# Altium PCB PCBsoldeerstation.PcbDoc
Units mil, origin at the board's own origin, x right, y up, seen from the top; angles counter-clockwise.
Board outline 3550.6 x 3574.88 mil, 2 copper layers (Top Layer, Bottom Layer); 64 components, 59 nets, 212 pads, 0 vias.
Unrouted connection lines stored in the file: 144.
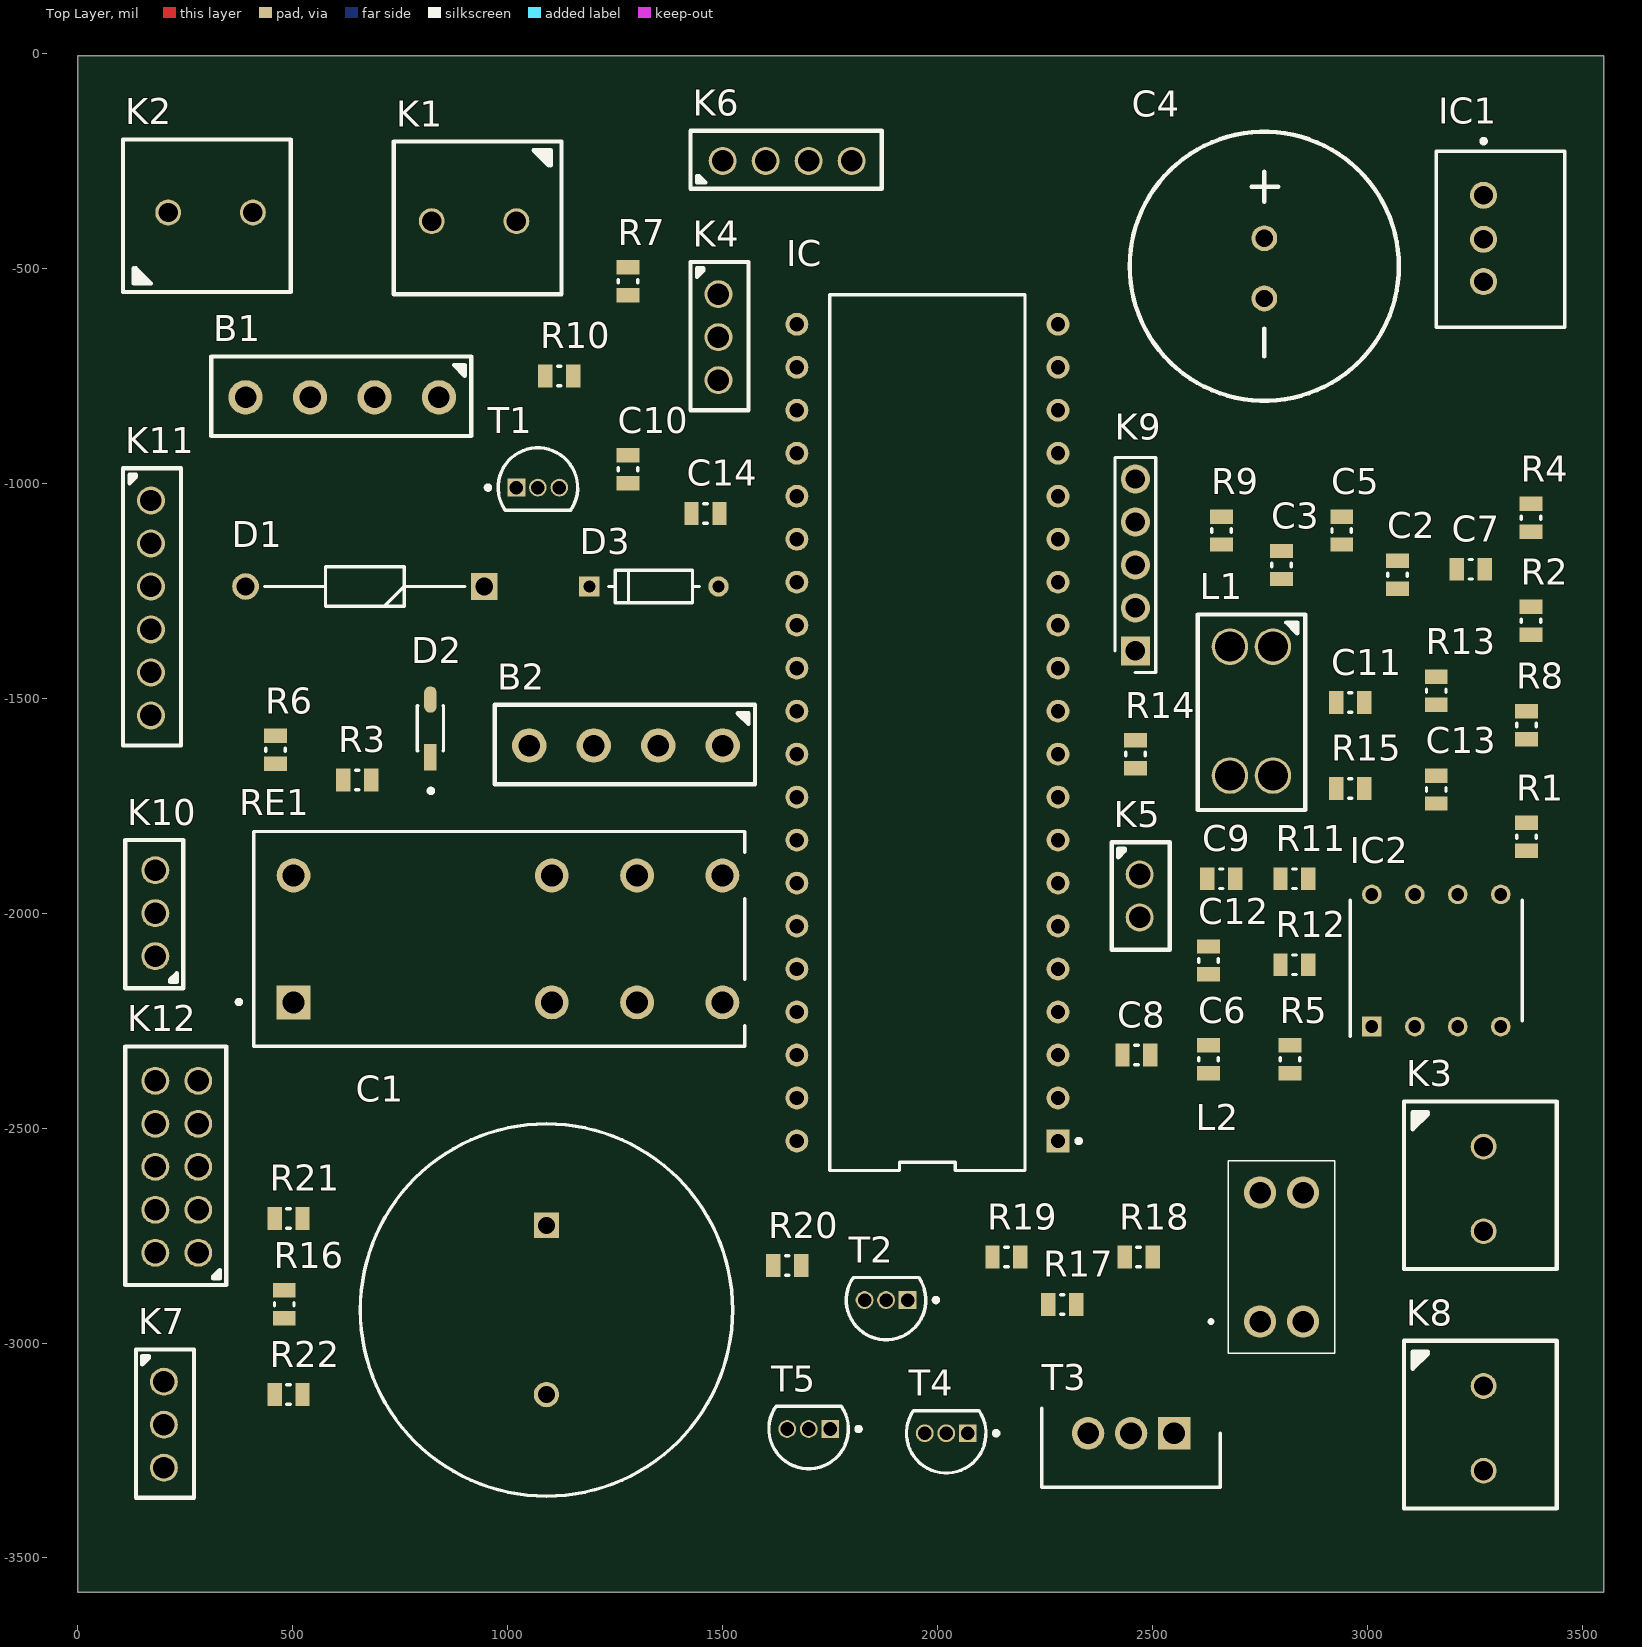
[diagram p0: Top Layer view]
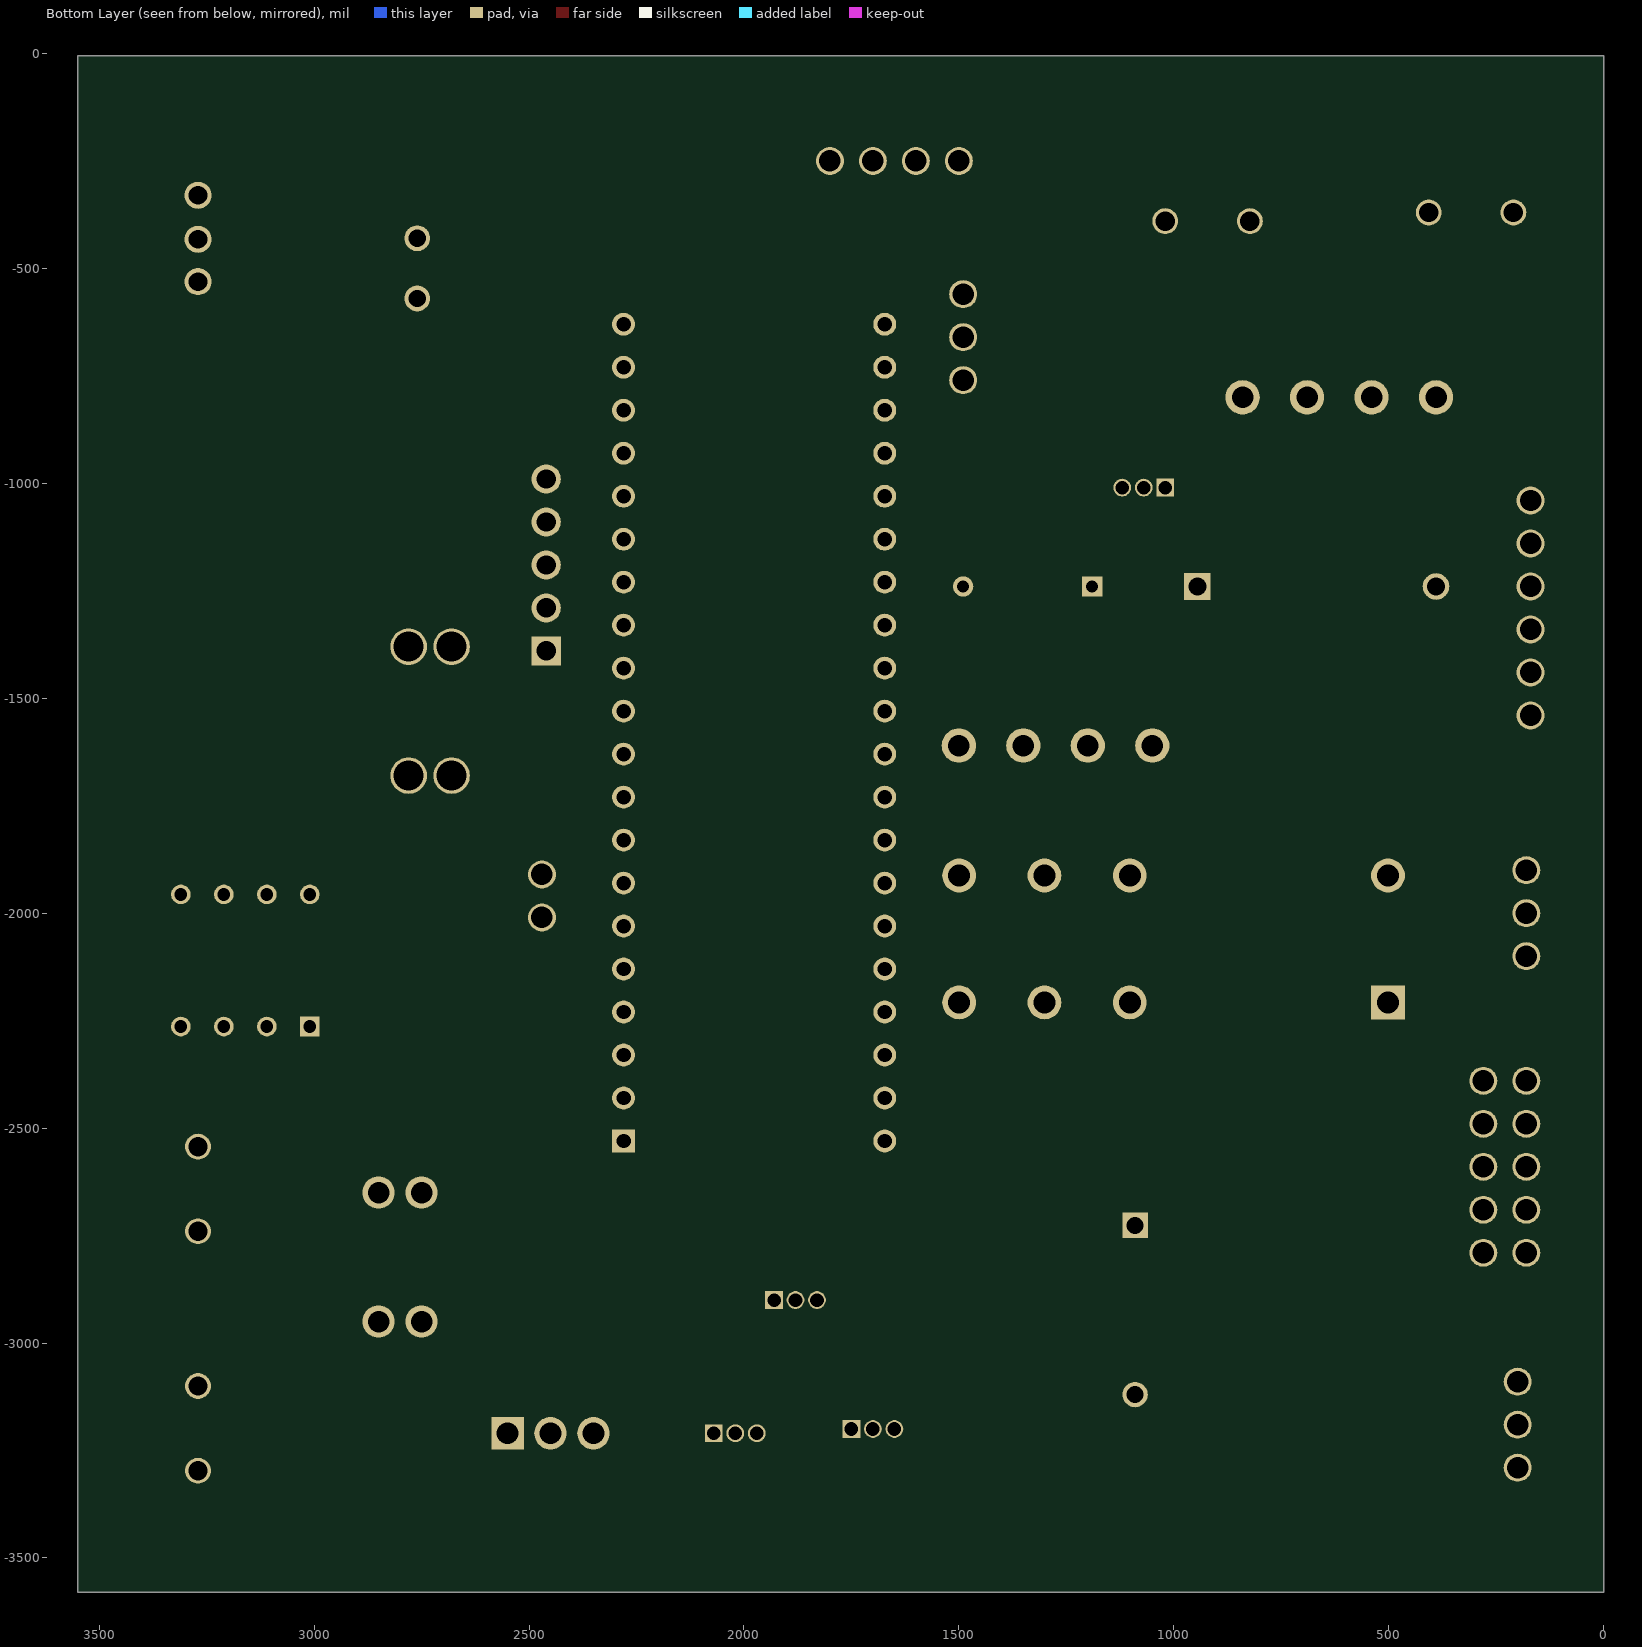
[diagram p1: Bottom Layer view, seen from below]

## Layer stack, top to bottom
Top Solder: solder mask 0.4, Solder Resist, Dk 3.5
Top Layer: signal copper 1.4
Dielectric 1: dielectric 12.6, FR-4, Dk 4.8
Bottom Layer: signal copper 1.4
Bottom Solder: solder mask 0.4, Solder Resist, Dk 3.5

## Board outline
-0.6,-5.12 3550,-5.12 3550,-3580 -0.6,-3580

## Design rules (kind name [scope] priority, off if disabled: settings)
Clearance [All] p1: gap=10 ignorepadtopadclearanceinfootprint=FALSE except(0: Arc-Hole Track-Hole SMDPad-Hole THPad-Hole Via-Hole Fill-Hole Poly-Hole Region-Hole Text-Hole)
PolygonConnect [All] p1: connectstyle=Relief reliefconductorwidth=10 reliefentries=4 polygonreliefangle="90 Angle" airgapwidth=10
RoutingVias [All] p1: holewidth=28 width=50 viastyle="Through Hole" minholewidth=28 minwidth=50 maxholewidth=28 maxwidth=50
SolderMaskExpansion [All] p1: expansion=4 istentingtop=FALSE
Width [All] p1: maxlimit=50 minlimit=25 preferedwidth=30 minimp=50.000000 maximp=50.000000 favimp=50.000000
30 further rules are at their usual default settings.

## Classes and differential pairs
component class voeding: B1 B2 C1 C4 C5 D1 D2 IC1 K1 K2 R3 R6 R7 R10 RE1 T1
component class thermokoppel: K8 L2 R17 R18 R19 R20 T2 T3 T4 T5
component class soldeerboutaansturing: C2 C3 C6 C7 C12 C13 IC2 K3 R1 R2 R4 R5 R8 R9 R11 R12 R13 R14 R15
component class cpuofmicrocontroller: C8 C9 C10 C11 C14 D3 IC K4 K5 K6 K7 K9 K10 K11 K12 L1 R16 R21 R22

## Components (designator, comment, footprint, x,y, rotation, side; value= is the part's Value field where it differs from the comment)
B1 "D6KB6U" D6KB6U 840,-800 r180 top
B2 "D6KB6U" D6KB6U 1500,-1610 r180 top
C1 "4700µ" CAPPRD1000W80D2200H3700 1090,-2726.3 r270 top
C2 "" RESC2013X50X30LL20T20 3070,-1212.48 r90 top value="0.10 μF"
C3 "" RESC2013X50X30LL20T20 2800,-1190 r90 top
C4 "100µ" "100uF/50v aluminum electrolytic capacitor" 2760,-430 r270 top value="0.10 μF"
C5 "10µ" RESC2013X50X30LL20T20 2940,-1110 r90 top value="0.10 μF"
C6 "10n" RESC2013X50X30LL20T20 2630,-2340 r90 top
C7 "10n" RESC2013X50X30LL20T20 3240,-1200 r180 top
C8 "100n" RESC2013X50X30LL20T20 2462.48,-2330 r0 top
C9 "100n" RESC2013X50X30LL20T20 2660,-1920 r0 top
C10 "10µ" RESC2013X50X30LL20T20 1280,-967.52 r270 top value="0.10 μF"
C11 "100n" RESC2013X50X30LL20T20 2960,-1510 r0 top
C12 "10n" RESC2013X50X30LL20T20 2630,-2110 r270 top
C13 "10n" RESC2013X50X30LL20T20 3160,-1712.48 r90 top
C14 "100n" RESC2013X50X30LL20T20 1460,-1070 r0 top
D1 "1N4007" DIOAD1405W86L465D235 945.12,-1240 r180 top
D2 "5V1" FP-SOD123-IPC_A 820,-1570 r90 top
D3 "1N4148" FP-017AG-MFG 1340,-1240 r0 top
IC "ATMEGA4809-PF" FP-C04-016-MFG 1976.25,-1580 r180 top
IC1 "" MURA-OKI-78SR-3 3270,-432.36 r270 top
IC2 "OPAMP" DIP781W56P254L950H533Q8N 3160,-2110 r90 top
K1 "printkroonsteen 2pin" "printkroonsteen 2pin" 1020,-390 r180 top
K2 "printkroonsteen 2pin" "printkroonsteen 2pin" 210,-370 r0 top
K3 "printkroonsteen 2pin" "printkroonsteen 2pin" 3270,-2543 r270 top
K4 "" "PINHEADER, 1RIJIG,3-POLIG" 1490,-560 r270 top
K5 "" Pinheader,1rijig,2-polig 2470,-1910 r270 top
K6 "" "PINHEADER, 1RIJIG,4-POLIG - duplicate" 1500,-250 r0 top
K7 "Pinheader,1rijig,3-polig" "PINHEADER, 1RIJIG,3-POLIG" 200,-3090 r270 top
K8 "" "printkroonsteen 2pin" 3270,-3100 r270 top
K9 "" HDRV5W67P0X254_1X5_1270X241X858P 2460,-1390 r90 top
K10 "" "PINHEADER, 1RIJIG,3-POLIG" 180,-2100 r90 top
K11 "" "PINHEADER, 1RIJIG,6-POLIG - duplicate - duplicate" 170,-1040 r270 top
K12 "Pinheader,2rijig,10-polig" "PINHEADER, 2RIJIG,10-POLIG - duplicate - duplicate - duplicate" 280,-2790 r90 top
L1 "10µH" "Laird CM2545x171B-10" 2780,-1380 r180 top
L2 "CM2545X171B-10" CM2545X171B10 2750,-2950 r0 top
R1 "18K" RESC2013X50X30LL20T20 3370,-1822.48 r270 top
R2 "1M" RESC2013X50X30LL20T20 3380,-1320 r90 top
R3 "68K" RESC2013X50X30LL20T20 650,-1690 r180 top
R4 "5K6" RESC2013X50X30LL20T20 3380,-1080 r270 top
R5 "5K6" RESC2013X50X30LL20T20 2820,-2340 r90 top
R6 "10K" RESC2013X50X30LL20T20 460,-1620 r270 top
R7 "10K" RESC2013X50X30LL20T20 1280,-530 r270 top
R8 "100" RESC2013X50X30LL20T20 3370,-1562.48 r270 top
R9 "10M" RESC2013X50X30LL20T20 2660,-1110 r270 top
R10 "4K7" RESC2013X50X30LL20T20 1120,-750 r180 top
R11 "10K" RESC2013X50X30LL20T20 2830,-1920 r180 top
R12 "18K" RESC2013X50X30LL20T20 2830,-2120 r0 top
R13 "5K6" RESC2013X50X30LL20T20 3160,-1482.48 r90 top
R14 "5K6" RESC2013X50X30LL20T20 2460,-1630 r270 top
R15 "100" RESC2013X50X30LL20T20 2960,-1710 r0 top
R16 "4k7" RESC2013X50X30LL20T20 480,-2910 r270 top
R17 "4K7" RESC2013X50X30LL20T20 2290,-2910 r180 top
R18 "100" RESC2013X50X30LL20T20 2467.52,-2800 r0 top
R19 "10k" RESC2013X50X30LL20T20 2160,-2800 r180 top
R20 "4K7" RESC2013X50X30LL20T20 1650,-2820 r180 top
R21 "4k7" RESC2013X50X30LL20T20 490,-2710 r180 top
R22 "4k7" RESC2013X50X30LL20T20 490,-3120 r0 top
RE1 "" FP-RT424005-MFG 980,-2060 r0 top
T1 "BC547C" ONSC-TO-92-3-29-11 1070,-1010 r0 top
T2 "BC547C" ONSC-TO-92-3-29-11 1880,-2900 r180 top
T3 "IRF9Z34NPBF" TO254P469X1042X1967-3P 2550,-3210 r180 top
T4 "BC547C" ONSC-TO-92-3-29-11 2020,-3210 r180 top
T5 "BC557C" ONSC-TO-92-3-29-11 1700,-3200 r180 top

## Footprints (in the part's own frame and the unit in brackets; to place one, negate y for a bottom-side part, rotate by r counter-clockwise, add the part's x,y. Pads: shape width x height; smd on the part's side, far side on the other; paste and mask are expansions set on the pad)
"100uF/50v aluminum electrolytic capacitor" [mil]
  round 60 hole 40: 1(0,0) 2(140,0)
  silkscreen extent -248,-313 378,313
CAPPRD1000W80D2200H3700 [mm]
  rect 1.5x1.5 hole 1: 1(0,0)
  round 1.5 hole 1: 2(10,0)
  silkscreen extent -6,-11 16,11, body extent -6.24,-11.25 16.24,11.25, height 38.01
CM2545X171B10 [mil]
  round 75 hole 50: 1(0,0) 2(100,0) 3(100,300) 4(0,300)
  silkscreen extent -118,-74 174,374, body extent -74,-74 174,374, height 378
D6KB6U [mil] "bridge rectifier"
  round 80 / inner round 60 / far side round 80 hole 50: 1(0,0) 2(150,0) 3(300,0) 4(450,0)
  silkscreen extent -75,-95 530,90
DIOAD1405W86L465D235 [mm]
  rect 1.575x1.575 hole 1.05: 1(0,0)
  round 1.575 hole 1.05: 2(14.1,0)
  silkscreen extent 1.14,-1.17 12.96,1.17, body extent -0.43,-1.34 14.48,1.34, height 2.7
DIP781W56P254L950H533Q8N [mm]
  rect 1.158x1.158 hole 0.758: 1(-3.905,3.81)
  round 1.158 hole 0.758: 2(-3.905,1.27) 3(-3.905,-1.27) 4(-3.905,-3.81) 5(3.905,-3.81) 6(3.905,-1.27) 7(3.905,1.27) 8(3.905,3.81)
  silkscreen extent -4.48,-5.08 3.56,5.08, body extent -4.04,-4.75 4.04,4.75, height 5.33
FP-017AG-MFG [mm]
  rect 1.2x1.2 hole 0.7 paste-1000 mask+0: 1(-3.813,0)
  round 1.2 hole 0.7 paste-1000 mask+0: 2(3.813,0)
  silkscreen extent -2.68,-0.95 2.68,0.95, body extent -4.51,-1.05 4.51,1.05, height 0.25
FP-C04-016-MFG [mm]
  rect 1.35x1.35 hole 0.85 paste-1000 mask+0: 1(-7.715,24.13)
  round 1.35 hole 0.85 paste-1000 mask+0: 2(-7.715,21.59) 3(-7.715,19.05) 4(-7.715,16.51) 5(-7.715,13.97) 6(-7.715,11.43) 7(-7.715,8.89) 8(-7.715,6.35) 9(-7.715,3.81) 10(-7.715,1.27) 11(-7.715,-1.27) 12(-7.715,-3.81) 13(-7.715,-6.35) 14(-7.715,-8.89) 15(-7.715,-11.43) 16(-7.715,-13.97) 17(-7.715,-16.51) 18(-7.715,-19.05) 19(-7.715,-21.59) 20(-7.715,-24.13) 21(7.715,-24.13) 22(7.715,-21.59) 23(7.715,-19.05) 24(7.715,-16.51) 25(7.715,-13.97) 26(7.715,-11.43) 27(7.715,-8.89) 28(7.715,-6.35) 29(7.715,-3.81) 30(7.715,-1.27) 31(7.715,1.27) 32(7.715,3.81) 33(7.715,6.35) 34(7.715,8.89) 35(7.715,11.43) 36(7.715,13.97) 37(7.715,16.51) 38(7.715,19.05) 39(7.715,21.59) 40(7.715,24.13)
  silkscreen extent -9.07,-25.88 5.76,25.88, body extent -8.49,-26.71 8.49,26.71, height 0.25
FP-RT424005-MFG [mm]
  round 2 hole 1.3 paste-1000 mask+0: 11(8.15,-3.75) 12(3.11,-3.75) 14(13.19,-3.75) 21(8.15,3.75) 22(3.11,3.75) 24(13.19,3.75) A2(-12.15,3.75)
  rect 2x2 hole 1.3 paste-1000 mask+0: A1(-12.15,-3.75)
  silkscreen extent -15.5,-6.35 14.5,6.35, body extent -14.6,-6.45 14.6,6.45, height 0.25
FP-SOD123-IPC_A [mil]
  rect 61.32x29.23 smd paste+0 mask+0: 1(-66.94,0)
  rrect100% 61.32x29.23 smd paste+0 mask+0: 2(66.94,0)
  silkscreen extent -150,-31 52,31, body extent -117,-50 117,50, height 10
HDRV5W67P0X254_1X5_1270X241X858P [mm]
  rect 1.725x1.725 hole 1.15: 1(0,0)
  round 1.725 hole 1.15: 2(2.54,0) 3(5.08,0) 4(7.62,0) 5(10.16,0)
  silkscreen extent -1.27,-1.2 11.43,1.2, body extent -1.27,-1.2 11.43,1.2, height 8.58
"Laird CM2545x171B-10" [mil] "spoel 2"
  round 85 hole 70: 1(0,0) 2(100,0) 3(100,300) 4(0,300)
  silkscreen extent -75,-75 175,380
MURA-OKI-78SR-3 [mm] "THMT, 3-Leads, Body 10.4x7.6mm"
  round 1.6 hole 1.1: 1(-2.6,0) 2(0,0) 3(2.5,0)
  silkscreen extent -5.92,-2.8 5.2,4.8, body extent -5.2,-2.8 5.2,4.8, height 16.5
ONSC-TO-92-3-29-11 [mm] "TO, 3-Leads, Body Dia 4.7mm, Pitch 1.27mm"
  rect 1.05x1.05 hole 0.8: 1(-1.27,0)
  round 1.05 hole 0.8: 2(0,0) 3(1.27,0)
  silkscreen extent -3.07,-1.34 2.35,2.35, body extent -2.35,-1.33 2.36,2.36, height 7.87
Pinheader,1rijig,2-polig [mil]
  round 65 hole 50: 1(0,0) 2(100,0)
  silkscreen extent -75,-65 175,70
"PINHEADER, 1RIJIG,3-POLIG" [mil]
  round 65 hole 50: 1(0,0) 2(100,0) 3(200,0)
  silkscreen extent -75,-65 270,70
"PINHEADER, 1RIJIG,4-POLIG - duplicate" [mil]
  round 65 hole 50: 1(0,0) 2(100,0) 3(200,0) 4(300,0)
  silkscreen extent -75,-65 370,70
"PINHEADER, 1RIJIG,6-POLIG - duplicate - duplicate" [mil]
  round 65 hole 50: 1(0,0) 2(100,0) 3(200,0) 4(300,0) 5(400,0) 6(500,0)
  silkscreen extent -75,-65 570,70
"PINHEADER, 2RIJIG,10-POLIG - duplicate - duplicate - duplicate" [mil]
  round 65 hole 50: 1(0,0) 2(100,0) 3(200,0) 4(300,0) 5(400,0) 6(0,100) 7(100,100) 8(200,100) 9(300,100) 10(400,100)
  silkscreen extent -75,-65 480,170
"printkroonsteen 2pin" [mil]
  round 60 hole 45: 1(0,0) 2(197,0)
  silkscreen extent -105,-185 285,170
RESC2013X50X30LL20T20 [mm] "Chip Resistor, 2-Leads, Body 2.00x1.25mm, IPC High Density"
  rect 0.85x1.35 smd: 1(-0.825,0) 2(0.825,0)
  silkscreen extent -0.1,-0.58 0.1,0.58, body extent -1.1,-0.72 1.1,0.72, height 0.5
TO254P469X1042X1967-3P [mm]
  rect 1.92x1.92 hole 1.28: 1(0,0)
  round 1.92 hole 1.28: 2(2.54,0) 3(5.08,0)
  silkscreen extent -2.73,-1.5 7.81,3.19, body extent -2.67,-1.5 7.75,3.19, height 18.84

## Part data
C1: library part CondensatorGroot, "Capacitor Polarised", Manufacturer_Name=KEMET, Manufacturer_Part_Number=ESK478M050AQ3AA, Mouser Part Number=80-ESK478M050AQ3AA, Datasheet Link=https://content.kemet.com/datasheets/KEM_A4004_ESK.pdf, Height=37mm, Mouser Price/Stock=https://www.mouser.co.uk/ProductDetail/KEMET/ESK478M050AQ3AA?qs=gt1LBUVyoHl7SM9dsUCJjA%3D%3D
C2: library part "Elektrolytische Capacitor", "CAP CER 0.1UF 10V X5R 0402", Capacitance="0.10 μF", Manufacturer=Kemet, Manufacturer Part Number=C0402C104K8PACTU, Package=C0402-BB, Temperature="-55°C to +125°C", Temperature Characteristic=X5R, Temperature Coefficient=15%, Temperature Range High=+125°C, Temperature Range Low=-55°C, Tolerance=0.1, Voltage Rating="10 V", Automotive=No, Category=Cap, ComponentLink2Description=Datasheet, ComponentLink2URL=https://content.kemet.com/datasheets/KEM_C1002_X7R_SMD.pdf, Device Class L1="Passive Components", Device Class L2=Capacitors, Device Class L3="Ceramic Capacitors", Digikey Description="CAP CER 0.1UF 10V X5R 0402", Height=0.55mm, Ipc Land Pattern Name=CAPC10050X50, Lead Free=Yes, Material=Ceramic, Mouser Description="Capacitor 100 nF 10 VDC 0402 | KEMET C0402C104K8PACTU (Capacitor 100 nF 10 VDC 0402 Ceramic Capacitors).", Octopart=https://octopart.com/c0402c104k8pactu-kemet-140039, RoHS=TRUE
C3 C14: library part "Ceramische Capacitor"
C4 C5 C10: library part Capacitor, "CAP CER 0.1UF 10V X5R 0402", Capacitance="0.10 μF", Manufacturer=Kemet, Manufacturer Part Number=C0402C104K8PACTU, Package=C0402-BB, Temperature="-55°C to +125°C", Temperature Characteristic=X5R, Temperature Coefficient=15%, Temperature Range High=+125°C, Temperature Range Low=-55°C, Tolerance=0.1, Voltage Rating="10 V", Automotive=No, Category=Cap, ComponentLink2Description=Datasheet, ComponentLink2URL=https://content.kemet.com/datasheets/KEM_C1002_X7R_SMD.pdf, Device Class L1="Passive Components", Device Class L2=Capacitors, Device Class L3="Ceramic Capacitors", Digikey Description="CAP CER 0.1UF 10V X5R 0402", Height=0.55mm, Ipc Land Pattern Name=CAPC10050X50, Lead Free=Yes, Material=Ceramic, Mouser Description="Capacitor 100 nF 10 VDC 0402 | KEMET C0402C104K8PACTU (Capacitor 100 nF 10 VDC 0402 Ceramic Capacitors).", Octopart=https://octopart.com/c0402c104k8pactu-kemet-140039, RoHS=TRUE
C6 C7 C8 C9 C11 C12 C13: library part capacitor2
D1: library part 1N4007-E3_73, "Diode", Arrow Part Number=1N4007-E3/73, Manufacturer_Name=Vishay, Mouser Part Number=625-1N4007-E3/73, Arrow Price/Stock=https://www.arrow.com/en/products/1n4007-e373/vishay?region=europe, Datasheet Link=https://mouser.componentsearchengine.com/Datasheets/2/1N4007-E3_73.pdf, Manufacturer_Part_Number=1N4007-E3/73, Mouser Price/Stock=https://www.mouser.co.uk/ProductDetail/Vishay-General-Semiconductor/1N4007-E3-73?qs=N4vtoAxH%2FSqT3Ng3e4K0Gw%3D%3D
D2: library part Zenerdiode, "DIODE ZENER 5.1V 500MW SOD123", Forward Current=10mA, Manufacturer="Diodes Incorporated", Manufacturer Part Number=BZT52C5V1-7-F, Max Junction Temp=+150°C, Max Reverse Leakage Current=2uA, Max Zener Voltage=5.4V, Nom Zener Voltage=5.1V, Package=SOD123, Power Dissipation=370mW, Temperature="-65°C to +150°C", Temperature Range Low=-65°C, Automotive=No, Automotive Grade=NA, Category=Diode, ComponentLink2Description=Datasheet, ComponentLink2URL=https://www.diodes.com/assets/Datasheets/ds18004.pdf, Device Class L1="Discrete Semiconductors", Device Class L2=Diodes, Device Class L3="Zener Diodes", Digikey Description="DIODE ZENER 5.1V 500MW SOD123", Footprint Url=https://www.diodes.com/assets/Package-Files/SOD123.pdf, Height=1.45mm, Lead Free=Yes, Mouser Description="Zener Diodes 5.1V 500mW", Octopart=https://octopart.com/bzt52c5v1-7-f-diodes+inc.-326718, RoHS=TRUE, Standoff Height=0mm, Temperature Range High=+150°C, Zener Impedance=60Ω
D3: "DIODE GEN PURP 100V 200MA DO35/1N4148", Average Rectified Current=200mA, Capacitance=4pF, Case/Package=DO-35, Current=4A, Forward Current=300mA, Forward Voltage=1V, Max Forward Surge Current (Ifsm)=1A, Max Operating Temperature=175°C, Max Power Dissipation=500mW, Max Repetitive Reverse Voltage (Vrrm)=100V, Max Reverse Current=5uA, Min Operating Temperature=-65°C, Package Quantity=2000, Contact Plating=Tin, Current Rating=200mA, Diameter=1.91mm, Element Configuration=Single, Height=4.56mm, Lead Free="Lead Free", Length=4.56mm, Max Reverse Voltage (DC)=100V, Max Surge Current=4A, Mount="Through Hole", Number of Pins=2, Output Current=200mA, Outside Diameter=1.85mm, Packaging=Bulk, Peak Non-Repetitive Surge Current=4A, Polarity=Standard, Power Dissipation=500mW, Radiation Hardening=No, REACH SVHC="No SVHC", Recovery Time=4ns, Reverse Recovery Time=4ns, Reverse Voltage=100V, Series=-, Voltage=100V, Voltage Rating (DC)=100V, Weight=0.01lb, Width=1.91mm
IC: library part aTmega4809-PF, "IC MCU 8BIT 48KB FLASH 40DIP", RoHS Compliant=Yes
IC1: library part OKI-78SR-5/1.5-W36-C, "Non-Isolated DC/DC Converter, 7.5 W, 7 to 36 V, 1.5 A, -40 to 85 degC, 3-Pin THD, RoHS", Current - Output (Max)=1.5A, Manufacturer=Murata, Operating Temperature=-40degC~85degC, Package / Case=3-SIPModule, Power (Watts) - Manufacture Series=8W, Voltage - Input (Max)=36V, Voltage - Input (Min)=7V, Voltage - Isolation=-, Voltage - Output 1=5V, Applications=ITE(Commercial), Category=PowerSupplies-BoardMount, Datasheet URL=https://datasheet.ciiva.com/8006/1790439-8006672.pdf, Datasheet Version=Oct-13, Efficiency=90.5%, Family=DCDCConverters, Features=SCP, Manufacturer URL=http://www.murata.com/, Mounting Type=ThroughHole, Number of Outputs=1, Packaging=Tube, Power (Watts) - Max=8W, Series=Okami™OKI-78SR, Size / Dimension="0.41\"Lx0.30\"Wx0.65\"H(10.4mmx7.6mmx16.5mm)", Type=LinearRegulatorReplacement, Voltage - Output 2=-, Voltage - Output 3=-
IC2: "CMP-0187-00133-3", Case/Package=PDIP, Input Bias Current=1pA, Input Offset Voltage (Vos)=4.5mV, Max Operating Temperature=125°C, Max Supply Voltage=6V, Min Operating Temperature=-40°C, Min Supply Voltage=1.8V, Nominal Supply Current=100uA, Operating Supply Voltage=5.5V, Output Current=23mA, Package Quantity=60, Power Supply Rejection Ratio (PSRR)=86dB, Voltage Gain=112dB, Amplifier Type="GENERAL PURPOSE", Bandwidth=1MHz, Common Mode Rejection Ratio=60dB, Gain Bandwidth Product=1MHz, Height=3.3mm, Input Offset Voltage-Max=4.5mV, Lead Free="Lead Free", Length=9.27mm, Mount="Through Hole", Number of Amplifiers=2, Number of Channels=2, Number of Circuits=2, Number of Elements=2, Number of Pins=8, Operating Supply Current=100uA, Output Current per Channel=23mA, Packaging=Rail/Tube, Radiation Hardening=No, REACH SVHC="No SVHC", RoHS Compliant=Yes, Slew Rate=0.6V/µs, Slew Rate-Nom=0.6V/µs, Supply Current=100uA, Technology=CMOS, Unity Gain Bandwidth Product=1MHz, Width=6.35mm
K4 K10: library part Pinheader,1rijig,3-polig
K5: library part Pinheader,1rijig,2-polig
K6: library part Pinheader,1rijig,4-polig
K8: library part "printkroonsteen 2pin"
K9: library part "5PIN HEADERmale", "Connector", Arrow Part Number=68000-105HTLF, Manufacturer_Name="Amphenol Communications Solutions", Mouser Part Number=649-68000-105HTLF, Arrow Price/Stock=https://www.arrow.com/en/products/68000-105htlf/amphenol-fci, Datasheet Link=https://cdn.amphenol-cs.com/media/wysiwyg/files/drawing/68000.pdf, Height=8.58mm, Manufacturer_Part_Number=68000-105HTLF, Mouser Price/Stock=https://www.mouser.co.uk/ProductDetail/Amphenol-FCI/68000-105HTLF?qs=w%2Fv1CP2dgqrYgNyQVoiqDw%3D%3D
K11: library part Pinheader,2rijig,6-polig
L1: library part spoelL1
L2: "Transformer", Manufacturer_Name="Laird Technologies", Mouser Part Number=N/A, Arrow Part Number=CM2545X171B-10, Arrow Price/Stock=https://www.arrow.com/en/products/cm2545x171b-10/laird-technologies, Datasheet Link=https://datasheet.datasheetarchive.com/originals/dk/DKDS-7/122753.pdf, Height=9.5mm, Manufacturer_Part_Number=CM2545X171B-10, Mouser Price/Stock=https://www.mouser.co.uk/ProductDetail/Laird/CM2545X171B-10?qs=PzGy0jfpSMtNfkEypgU65A%3D%3D
R1 R2 R3 R4 R5 R6 R7 R8 R9 R10 R11 R12 R13 R14 R15 R16 R17 R18 R19 R20 R21 R22: library part weerstand, Manufacturer="Vishay Dale", Part Number=CRCW08050000Z0EA
RE1: library part RT424005, "RELAY GENERAL PURPOSE DPDT 8A 5V", Ambient Temperature Range High=+85°C, Ambient Temperature Range Low=-40°C, Coil Power=403mW, Coil Resistance=62Ω, Coil Voltage=5V, Current Rating=8A, Manufacturer="TE Connectivity", Automotive=No, Category=Relay, Coil Type=Non-Latching, ComponentLink2Description=Datasheet, ComponentLink2URL=https://www.te.com/commerce/DocumentDelivery/DDEController?Action=showdoc&DocId=Data+Sheet%7FRT2%7F1014%7Fpdf%7FEnglish%7FENG_DS_RT2_1014.pdf%7F5-1393243-9, Device Class L1=Electromechanical, Device Class L2=Relays, Device Class L3="Power Relays", Digikey Description="RELAY GENERAL PURPOSE DPDT 8A 5V", Height=15.7mm, Lead Free=Yes, Manufacturer Part Number=RT424005, Mouser Description="General Purpose Relay, Rt2 Series, Power, Non Latching, Dpdt, 5 Vdc, 8 A Rohs Compliant: Yes", Number Of Contacts=2, Octopart=https://octopart.com/5-1393243-9-te+connectivity-41835766, Package=RT424005, RoHS=TRUE, Throw Configuration=DPDT
T1 T2 T4: "Amplifier Transistor, NPN Silicon, 3-Pin TO-92, Bulk Box", Manufacturer="On Semiconductor", ComponentLink1Description="Manufacturer URL", ComponentLink1URL=http://www.onsemi.com/, ComponentLink2Description=Datasheet, ComponentLink2URL=http://www.onsemi.com/pub_link/Collateral/BC546-D.PDF, ComponentLink3Description="Package Specification", ComponentLink3URL=http://www.onsemi.cn/pub_link/Collateral/2N6426-D.PDF, DatasheetVersion="Rev. 7", fT Min (MHz)=150, IC Continuous (A)=0.1, Mounting Technology="Through Hole", PackageDescription="3-Pin Transistor Outline, Body 4.825 x 3.685 mm, Pitch 1.27 mm", PackageReference=TO-92-3-29-11_AM_SL, PackageVersion="Rev. AM", Packing="Bulk Box", PartNumber=BC547C, Polarity=NPN, RoHS=FALSE
T3: "MOSFET (P-Channel)", Manufacturer_Name=Infineon, Mouser Part Number=942-IRF9Z34NPBF, Arrow Part Number=IRF9Z34NPBF, Arrow Price/Stock=https://www.arrow.com/en/products/irf9z34npbf/infineon-technologies-ag?region=nac, Datasheet Link=https://www.infineon.com/dgdl/irf9z34npbf.pdf?fileId=5546d462533600a40153561220af1ddd, Height=4.69mm, Manufacturer_Part_Number=IRF9Z34NPBF, Mouser Price/Stock=https://www.mouser.co.uk/ProductDetail/Infineon-Technologies/IRF9Z34NPBF?qs=9%252BKlkBgLFf16a%2FvlD%252BMCtQ%3D%3D
T5: "Amplifier Transistor, PNP Silicon, 3-Pin TO-92, Bulk Box", Manufacturer="On Semiconductor", ComponentLink1Description="Manufacturer URL", ComponentLink1URL=http://www.onsemi.com/, ComponentLink2Description=Datasheet, ComponentLink2URL=http://www.onsemi.com/pub_link/Collateral/BC556B-D.PDF, ComponentLink3Description="Package Specification", ComponentLink3URL=http://www.onsemi.cn/pub_link/Collateral/2N6426-D.PDF, DatasheetVersion="Rev. 3", IC Continuous (A)=-0.1, Mounting Technology="Through Hole", PackageDescription="3-Pin Transistor Outline, Body 4.825 x 3.685 mm, Pitch 1.27 mm", PackageReference=TO-92-3-29-11_AM_SL, PackageVersion="Rev. AM", Packing="Bulk Box", PartNumber=BC557C, Polarity=PNP, RoHS=FALSE

## Nets (pads, with @x,y where several pads share a name; then routed paths per layer and width w, separated by ;. In a path a pad name is that pad's centre, name@x,y a point inside that pad or via, vN(x,y) a via of type N, cw(c..) or ccw(c..) an arc to the next point about the centre after c; other vN are vias at no path point)
+5V: C2.1 C3.1 C5.1 D1.1 D3.1 IC1.3 IC2.8 K6.1 K11.2 R2.2 RE1.A1
GND: B1.1 B2.1 C1.2 C2.2 C3.2 C4.2 C5.2 C6.2 C7.2 C8.2 C9.2 C10.2 C11.2 C12.2 C13.2 D2.2 IC1.2 IC2.4 IC.6 IC.18 IC.32 K3.2 K6.4 K7.1 K10.3 K11.6 K12.10 L2.4 R6.1 R8.1 R9.1 R10.1 R15.1 R20.2 T1.3 T4.3 T5.1
NetB1_2: B1.2 B2.4 K1.2 RE1.11
NetB1_4: B1.4 K2.2 RE1.22
NetB2_2: B2.2 K1.1 RE1.21
NetB2_3: B2.3 C4.1 IC1.1
NetC6_1: C6.1 IC.9 R5.1
NetC7_1: C7.1 IC2.5 R4.1
NetC8_1: C8.1 C9.1 C10.1 IC.5 IC.31 L1.4
NetC11_1: C11.1 IC.17 L1.1
NetC12_1: C12.1 IC.10 R14.2
NetC13_1: C13.1 IC2.3 R13.1
NetC14_1: C14.1 K11.3
NetC14_2: C14.2 D3.2 IC.29
NetD1_2: D1.2 RE1.A2 T1.1
NetD2_1: D2.1 IC.11 R3.1 R6.2
NetIC2_1: IC2.1 R11.1 R14.1
NetIC2_2: IC2.2 R12.2 R15.2
NetIC2_6: IC2.6 R1.2 R8.2
NetIC2_7: IC2.7 R1.1 R5.2
NetIC_1: IC.1 R19.1
NetIC_2: IC.2 K7.2 R16.2
NetIC_7: IC.7 K5.2
NetIC_8: IC.8 K5.1
NetIC_12: IC.12 K9.1
NetIC_13: IC.13 K9.2
NetIC_14: IC.14 K9.3
NetIC_15: IC.15 K9.4
NetIC_16: IC.16 K9.5
NetIC_19: IC.19 R7.1
NetIC_20: IC.20 K4.1
NetIC_21: IC.21 K4.2
NetIC_22: IC.22 K4.3
NetIC_23: IC.23 K6.2
NetIC_24: IC.24 K6.3
NetIC_27: IC.27 K11.1
NetIC_28: IC.28 K11.4
NetIC_30: IC.30 K11.5
NetIC_33: IC.33 K10.1
NetIC_34: IC.34 K10.2
NetIC_35: IC.35 K12.4 R22.1
NetIC_36: IC.36 K12.2 R21.1
NetIC_37: IC.37 K12.3
NetIC_38: IC.38 K12.5
NetIC_39: IC.39 K12.7
NetIC_40: IC.40 K12.9
NetK2_1: K2.1 RE1.12 RE1.24
NetK3_1: K3.1 R2.1 R4.2 R9.2 R13.2
NetK8_1: K8.1 L2.3
NetK8_2: K8.2 L2.2
NetL2_1: L2.1 T3.2
NetR7_2: R7.2 R10.2 T1.2
NetR11_2: R11.2 R12.1
NetR17_2: R17.2 T2.2 T4.1 T5.2
NetR18_1: R18.1 T2.3 T5.3
NetR18_2: R18.2 T3.1
NetR19_2: R19.2 R20.1 T4.2
VCC: B1.3 C1.1 K7.3 K12.1 R3.2 R16.1 R21.2 R22.2
VIN: R17.1 T2.1 T3.3
pads on no net: IC.3 IC.4 IC.25 IC.26 K12.6 K12.8 L1.2 L1.3 RE1.14

## Silkscreen, mask and mechanical layers (free items; w line width, h text height)
Board Outline:
  lines w10: 0,-3580 0,0 3550,0 3550,-3570 3560,-3580 0,-3580